# EAGLE board RatDBS-Compact2032Battery (EAGLE 7.3.0)
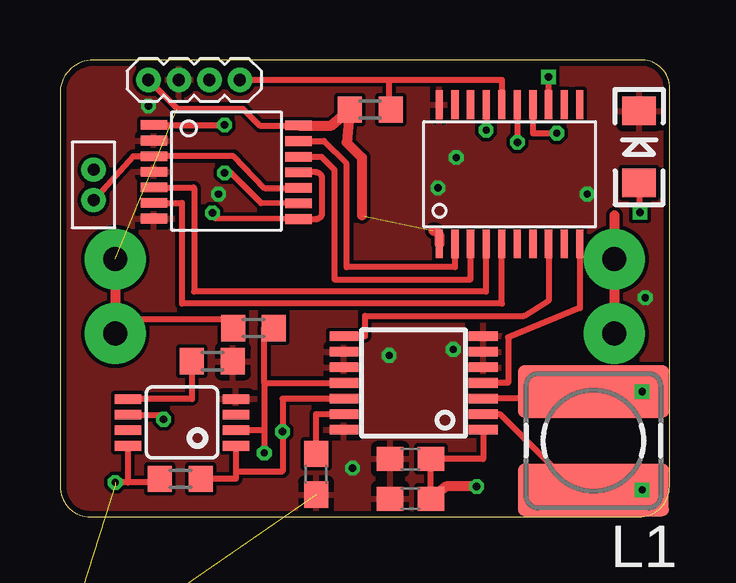
[diagram p0: board, top side]
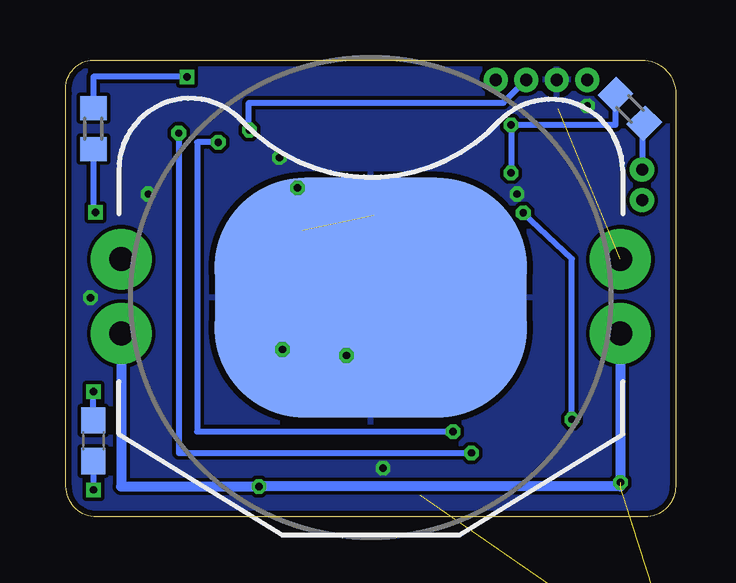
[diagram p1: board, bottom side, seen from below]

Size 25.41 x 19.06 mm. Coordinates in mm from the lower left corner, seen from the top.
Outline: 0,17.78 0,1.27 arc90 1.27,0 24.13,0 arc90 25.4,1.27 25.4,17.65 arc90 24.38,19.05 1.52,19.05 arc90 0,17.78
Copper layers (1*16): Top 0.035mm / dielectric 1.5mm / Bottom 0.035mm
Design rules "Seeed_DRU": minimum track width 6mil, minimum drill 12mil, track to track 6mil, track to pad 6mil, pad to pad 6mil, via to via 6mil, smd to smd 0mil, copper to edge 10mil, drill to drill 10mil, minimum pad ring 10mil, minimum via ring 6mil, stop-mask expansion 2mil, vias tented up to drill 100mil, thermal gap 10mil

## Footprints (pad centres in the part's own frame; a part is rotated, then mirrored left to right if it is on the bottom)
BATTCON_20MM_PTH_COMPACT = drill 1 pad 2.54: 1 -10.4,1.6; 3 10.4,1.6; 4 10.4,-1.5; 5 -10.4,-1.5 | smd 13 x 10: 2 0,0
C0603 = smd 1.1 x 1: 1 -0.85,0; 2 0.85,0
8_PIN = smd 1.1 x 0.4: 1 -2.25,0.975; 2 -2.25,0.325; 3 -2.25,-0.325; 4 -2.25,-0.975; 5 2.25,-0.975; 6 2.25,-0.325; 7 2.25,0.325; 8 2.25,0.975
1X04-1.27MM = drill 0.508 pad 1: 1 0,0; 2 1.27,0; 3 2.54,0; 4 3.81,0
POWER-CHOKE_WE-TPC = smd 6.3 x 2.2: 1 0,2.05; 2 0,-2.05
LED-1206 = smd 1.2 x 1.4: A -1.5,0; C 1.5,0
20_PIN = smd 0.3 x 1.2: 1 -2.925,-2.9; 2 -2.275,-2.9; 3 -1.625,-2.9; 4 -0.975,-2.9; 5 -0.325,-2.9; 6 0.325,-2.9; 7 0.975,-2.9; 8 1.625,-2.9; 9 2.275,-2.9; 10 2.925,-2.9; 11 2.925,2.9; 12 2.275,2.9; 13 1.625,2.9; 14 0.975,2.9; 15 0.325,2.9; 16 -0.325,2.9; 17 -0.975,2.9; 18 -1.625,2.9; 19 -2.275,2.9; 20 -2.925,2.9
R0603 = smd 1 x 1.1: 1 -0.85,0; 2 0.85,0
FTSH-102-DH = drill 0.5 pad 1: P$1 -0.635,0; P$2 0.635,0
14_PIN = smd 1.1 x 0.4: 1 -3.26,1.165; 2 -3.26,0.515; 3 -3.26,-0.135; 4 -3.26,-0.785; 5 -3.26,-1.435; 6 -3.26,-2.085; 7 -3.26,-2.735; 8 2.77,-2.755; 9 2.77,-2.105; 10 2.77,-1.455; 11 2.77,-0.805; 12 2.77,-0.155; 13 2.77,0.495; 14 2.77,1.145
PW_R-PDSO-G14 = smd 0.4 x 1.2: 1 -1.95,-2.9; 2 -1.3,-2.9; 3 -0.65,-2.9; 4 0,-2.9; 5 0.65,-2.9; 6 1.3,-2.9; 7 1.95,-2.9; 8 1.95,2.9; 9 1.3,2.9; 10 0.65,2.9; 11 0,2.9; 12 -0.65,2.9; 13 -1.3,2.9; 14 -1.95,2.9

## Placement (x,y rotation side)
BAT1  20mm coincell  [BATTCON_20MM_PTH_COMPACT]  12.7,9.14 0 bottom
C1  1u  [C0603]  14.61,2.41 180 top
C2  0.1u  [C0603]  14.61,0.76 180 top
C_VC  0.47u  [C0603]  10.67,1.78 270 top
CANT  [C0603]  24.26,3.17 270 bottom
CBAT  10u  [C0603]  1.14,-5.08 0 top  (outside the outline)
DS4432U+  [8_PIN]  5.08,3.94 180 top
JP1  [1X04-1.27MM]  3.68,18.22 0 top
L1  [POWER-CHOKE_WE-TPC]  22.23,3.17 180 top
LED6  GREEN  [LED-1206]  24.13,15.43 90 top
MSP430  MSP  [20_PIN]  18.73,14.29 0 top
R1_I2C  10k  [R0603]  5.02,1.59 180 top
R2_I2C  10k  [R0603]  8.06,7.87 180 top
R_INPUT_FS0  47k  [R0603]  6.35,6.49 180 top
R_LED  R_LED  [R0603]  24.26,16.19 270 bottom
R_LOAD_EX  10k  [R0603]  1.91,17.02 135 bottom
R_PULLUP_RST  43k  [R0603]  12.92,16.98 180 top
STIM  FTSH-102  [FTSH-102-DH]  1.4,13.84 90 top
TS3A4751_0  SW  [14_PIN]  7.18,15.18 0 top
U$1  RF  [PW_R-PDSO-G14]  14.73,5.59 90 top

## Library data of the parts
BAT1 = Battery
C1 C2 C_VC CANT CBAT L1 = rcl
DS4432U+ MSP430 = RatDBS
JP1 = SparkFun
LED6 = SparkFun-LED
R1_I2C R2_I2C R_INPUT_FS0 R_LED R_LOAD_EX R_PULLUP_RST TS3A4751_0 = BiphasicBoard
STIM = Samtec50Mil
U$1 = RF430CL330H

## Nets
_RST: JP1.4 MSP430.16 R_PULLUP_RST.1
GND: BAT1.2 C1.2 C2.2 C_VC.2 CBAT.2 DS4432U+.4 JP1.2 LED6.C MSP430.20 R_INPUT_FS0.1 TS3A4751_0.2 TS3A4751_0.4 TS3A4751_0.7 U$1.5 U$1.6 U$1.7 U$1.9 U$1.10 U$1.14
IN1: MSP430.2 TS3A4751_0.13
IN2: MSP430.4 TS3A4751_0.5
IN3: MSP430.5 TS3A4751_0.6
IN4: MSP430.3 TS3A4751_0.12
N$1: C_VC.1 U$1.13
N$2: CANT.2 L1.1 U$1.2
N$3: MSP430.8 U$1.8
N$4: R_LOAD_EX.1 STIM.P$2
N$5: MSP430.13 R_LED.1
N$6: MSP430.7
N$7: MSP430.10 U$1.4
N$8: DS4432U+.5 R_INPUT_FS0.2
N$9: LED6.A R_LED.2
N$12: CANT.1 L1.2 U$1.3
SCL: DS4432U+.2 MSP430.14 R2_I2C.1 U$1.11
SDA: DS4432U+.1 MSP430.15 R1_I2C.1 U$1.12
STIM_IN: DS4432U+.6 TS3A4751_0.8 TS3A4751_0.11
STIM_OUT1: R_LOAD_EX.2 TS3A4751_0.1 TS3A4751_0.9
STIM_OUT2: STIM.P$1 TS3A4751_0.3 TS3A4751_0.10
TEST: JP1.3 MSP430.17
VDD: BAT1.1 BAT1.3 BAT1.4 BAT1.5 C1.1 C2.1 CBAT.1 DS4432U+.8 JP1.1 MSP430.1 R1_I2C.2 R2_I2C.2 R_PULLUP_RST.2 TS3A4751_0.14 U$1.1

## Tracks (layer width: path | path; a pad name or v marks a point on that pad's centre or on a via)
_RST
  Top 0.254: MSP430.16 18.41,17.57 18.41,18.22 13.72,18.22 | 13.46,16.57 R_PULLUP_RST.1 13.72,17.05 13.72,18.22 | JP1.4 13.72,18.22
GND  (via drill 0.3)  (1 unrouted)
  other vias: 16.51,14.99 21.97,13.46 16.38,6.99 3.68,17.14 13.72,6.73 12.19,2.03 24.38,9.14 15.75,13.72 6.6,13.46
  pour Bottom: 0,19.05 25.4,19.05 25.4,0 0,0
  pour Top: 0,19.05 25.4,19.05 25.4,0 0,0
IN1
  Top 0.254: MSP430.2 16.46,10.41 11.94,10.41 11.94,14.73 11,15.67 TS3A4751_0.13
IN2
  Top 0.254: TS3A4751_0.5 5.56,13.74 5.59,13.72 5.59,9.4 17.76,9.4 MSP430.4
IN3
  Top 0.254: TS3A4751_0.6 5.08,13.09 5.08,8.89 18.41,8.89 MSP430.5
IN4
  Top 0.254: TS3A4751_0.12 10.89,15.02 11.43,14.48 11.43,9.91 17.11,9.91 MSP430.3
N$1
  Top 0.254: C_VC.1 10.67,4.29 U$1.13
N$2  (via drill 0.3)
  Top 0.254: U$1.2 18.32,4.29 21.48,1.12 L1.1 v24.26,1.12
  Bottom 0.254: CANT.2 v24.26,1.12
N$3
  Top 0.254: MSP430.8 20.36,9.02 19.34,8.38 12.7,8.38 12.7,7.54 U$1.8
N$4
  Bottom 0.254: R_LOAD_EX.1 1.4,16.42 STIM.P$2
N$5  (via drill 0.3)
  Top 0.254: MSP430.13 v20.36,18.35
  Bottom 0.254: v20.36,18.35 24.26,18.35 R_LED.1
N$7
  Top 0.254: U$1.4 18.67,5.59 18.67,7.49 21.66,8.7 MSP430.10
N$8
  Top 0.254: R_INPUT_FS0.2 5.5,4.91 DS4432U+.5
N$9  (via drill 0.3)
  Top 0.254: v24.17,12.7 LED6.A
  Bottom 0.254: R_LED.2 24.26,12.7 v24.17,12.7
N$12  (via drill 0.3)
  Top 0.254: U$1.3 22.23,4.94 L1.2 v24.26,5.22
  Bottom 0.254: CANT.1 v24.26,5.22
SCL  (via drill 0.3)
  Top 0.254: MSP430.14 19.71,16 v20.7,16 | 8.51,5.59 8.51,3.61 | 8.51,5.59 U$1.11 | 8.51,3.61 DS4432U+.2 | 8.51,3.61 v8.51,2.67 | 8.51,5.59 8.51,7.87 R2_I2C.1
  Bottom 0.254: v20.7,16 20.7,2.67 v8.51,2.67
SDA  (via drill 0.3)
  Top 0.254: MSP430.15 v19.06,15.62 | U$1.12 9.27,4.94 v9.27,3.56 9.27,1.91 7.33,1.91 DS4432U+.1 7.33,1.59 R1_I2C.1
  Bottom 0.254: v19.06,15.62 19.94,15.62 19.94,3.56 v9.27,3.56
STIM_IN  (via drill 0.3)
  Top 0.254: TS3A4751_0.11 10.67,14.37 arc-90 10.92,14.12 10.92,12.68 arc-90 10.67,12.42 TS3A4751_0.8 6.48,12.45 6.48,12.68 v6.35,12.68 | 4.32,3.88 v4.32,4.06 4.32,4.26 DS4432U+.6
  Bottom 0.254: v4.32,4.06 4.32,10.77 v6.35,12.68
STIM_OUT1  (via drill 0.3)
  Top 0.254: TS3A4751_0.9 8.38,13.08 7.11,14.35 v6.86,14.34 | TS3A4751_0.1 v6.86,16.34
  Bottom 0.254: v6.86,14.34 v6.86,16.34 2.51,16.34 R_LOAD_EX.2
STIM_OUT2
  Top 0.254: STIM.P$1 3.05,15.04 TS3A4751_0.3 7.24,15.04 8.51,13.72 TS3A4751_0.10
TEST  (via drill 0.3)
  Top 0.254: MSP430.17 v17.76,16.13
  Bottom 0.254: v17.76,16.13 17.78,16.13 17.78,17.27 7.18,17.27 JP1.3
VDD  (via drill 0.3)  (4 unrouted)
  Top 0.254: JP1.1 4.89,17.02 7.62,17.02 8.32,16.32 TS3A4751_0.14 | C2.1 C1.1 17.63,2.41 U$1.1 | DS4432U+.8 2.83,1.44 v2.3,1.44 4.17,1.44 R1_I2C.2 | BAT1.4 2.3,8.26 7.21,8.26 R2_I2C.2
  Top 0.406: 12.57,12.57 12.57,14.99 11.94,15.62 R_PULLUP_RST.2 11.31,16.32 TS3A4751_0.14 | BAT1.3 BAT1.4 | BAT1.1 BAT1.5 | v17.36,1.27 16.09,1.27 C2.1 | 15.55,11.94 arc-90 15.81,11.68 MSP430.1 | 23.1,11.68 BAT1.1 | 23.1,12.57 BAT1.1
  Bottom 0.406: BAT1.5 23.1,1.27 v17.36,1.27 2.3,1.27 BAT1.4

## Text on the board
tDocu: VGTR | STIM
bDocu: NFC-RDBS v1.2b / Kemere Lab (C)2015